# Altium PCB adapter.PcbDoc
Units mil, origin at the board's own origin, x right, y up, seen from the top; angles counter-clockwise.
Board outline 757 x 484 mil, 2 copper layers (Top Layer, Bottom Layer), stack 22.8 mil thick; 36 components, 27 nets, 125 pads, 53 vias.
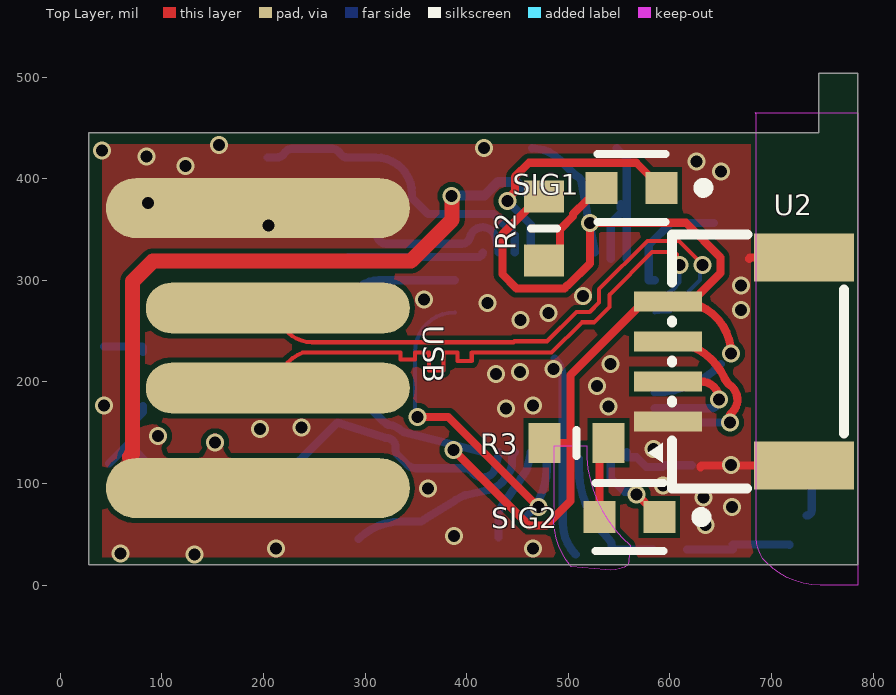
[diagram p0: Top Layer view]
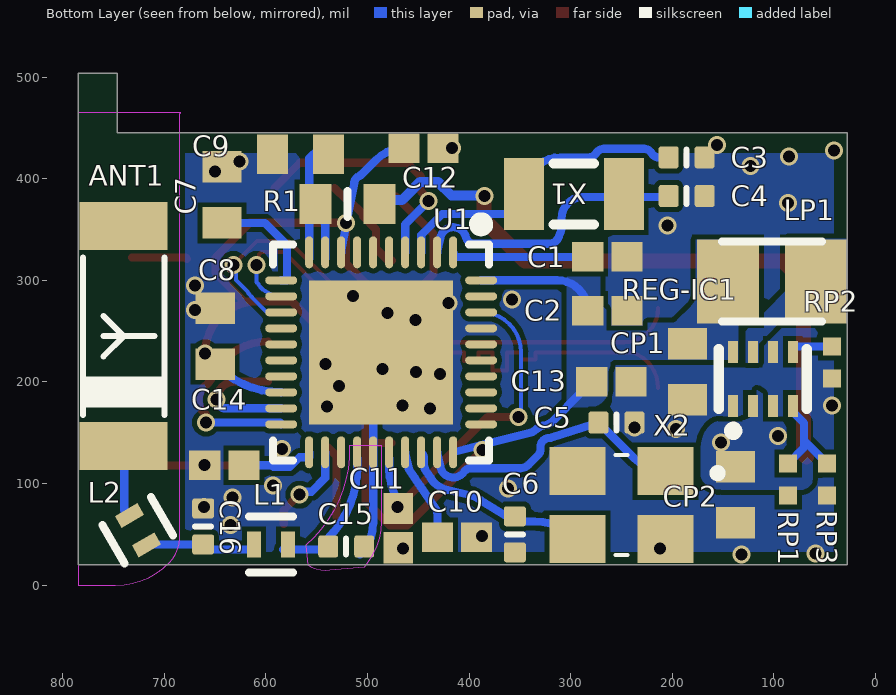
[diagram p1: Bottom Layer view, seen from below]
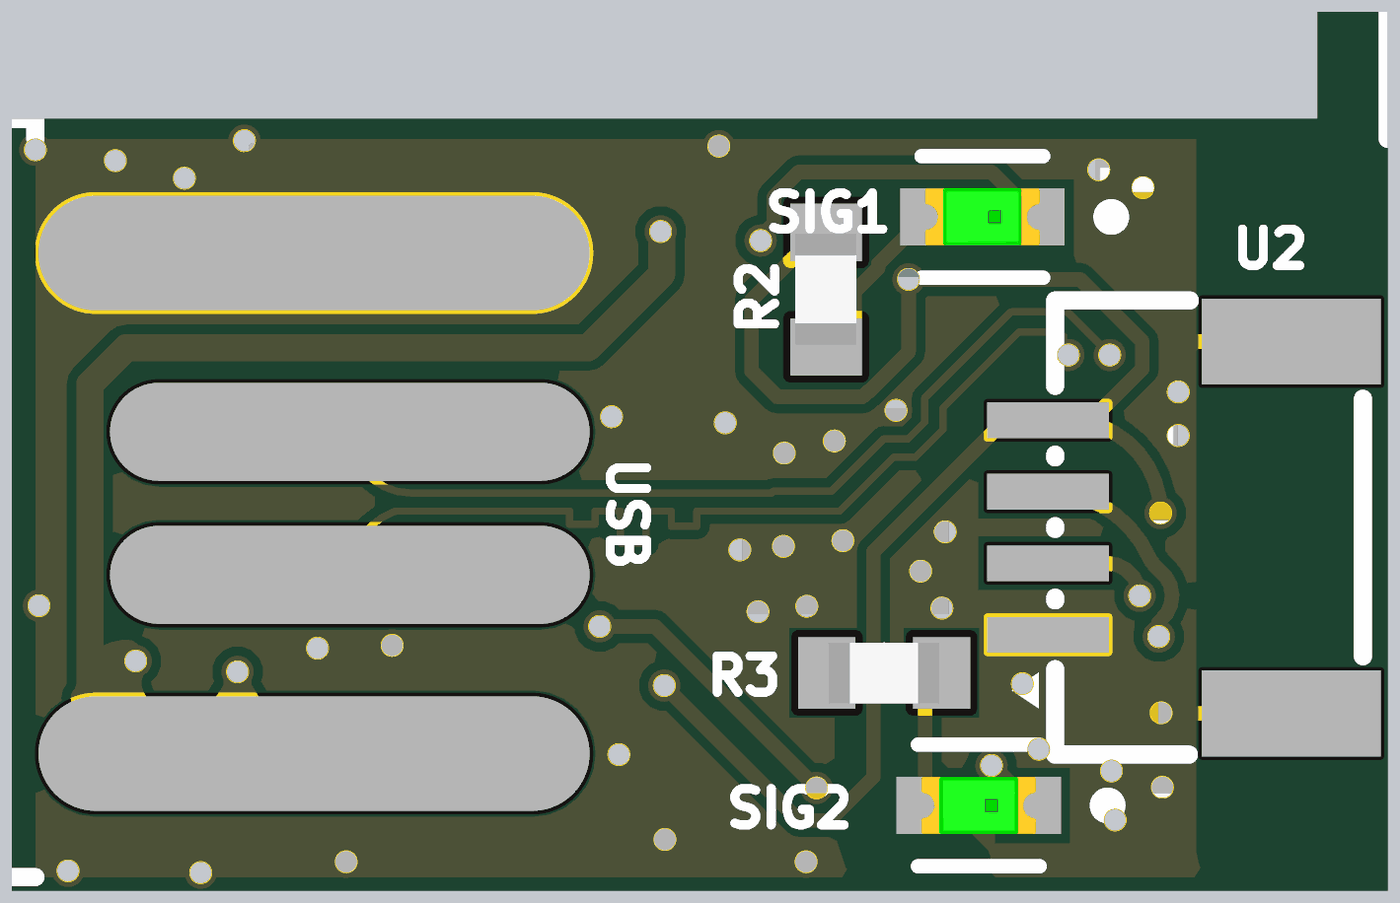
[diagram p2: 3D render of the assembled board from above, using the file's embedded part models]
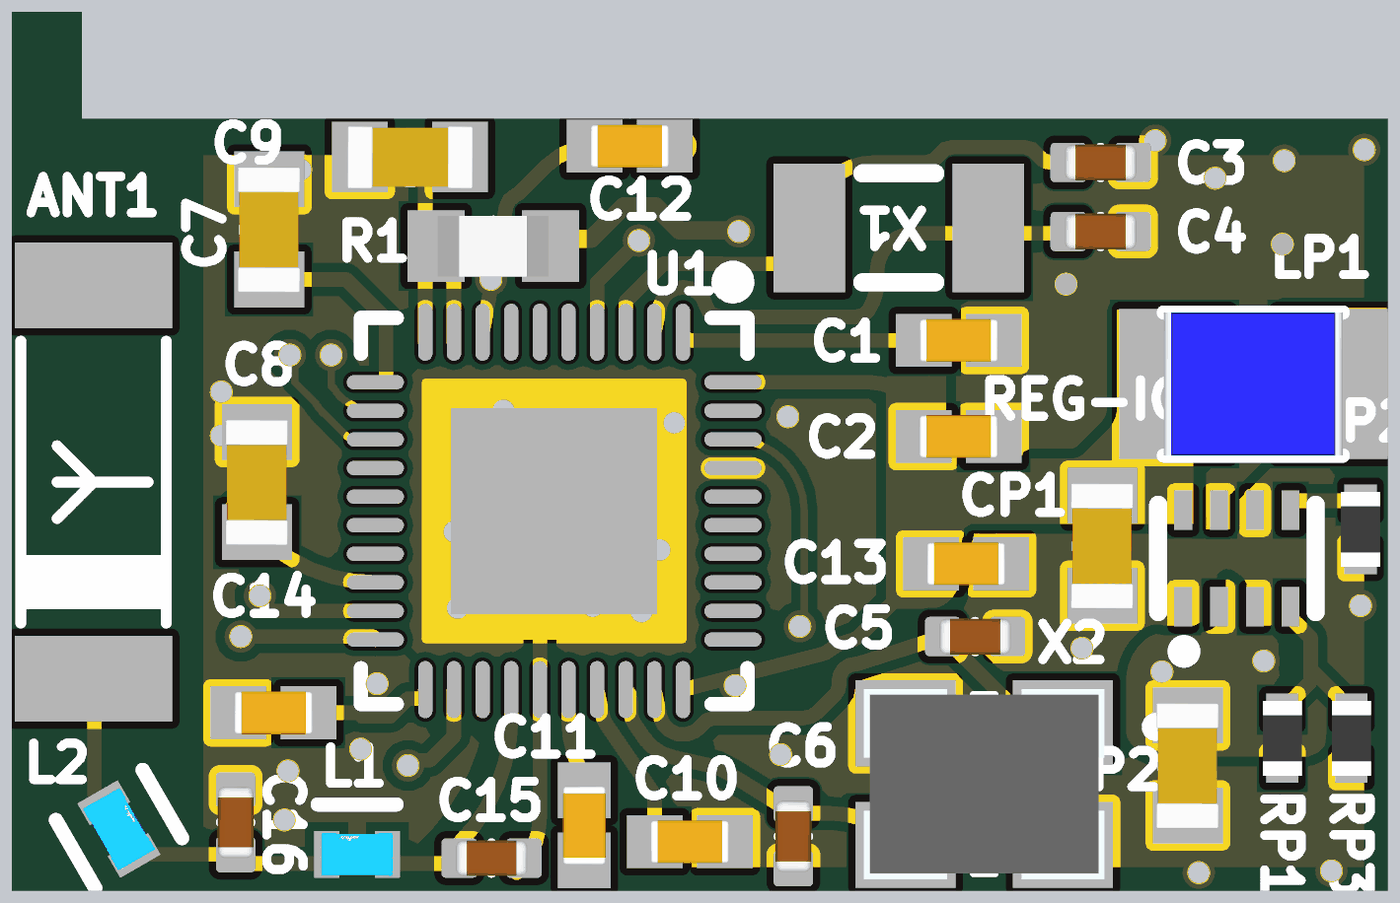
[diagram p3: 3D render of the assembled board from below, using the file's embedded part models]

## Layer stack, top to bottom
Top Solder: solder mask 0.4, Solder Resist, Dk 3.5
Top Layer: signal copper 1.4
Dielectric 1: dielectric 20, FR-4, Dk 4.8
Bottom Layer: signal copper 1.4
Bottom Solder: solder mask 0.4, Solder Resist, Dk 3.5

## Board outline
28,20 28,445 746.37,445 746.37,504 785,504 785,20

## Design rules (kind name [scope] priority, off if disabled: settings)
Clearance [All] p1: gap=5 ignorepadtopadclearanceinfootprint=TRUE
ComponentClearance [All] p1: gap=0 collisioncheckmode=3 verticalgap=10 showdistances=FALSE
DiffPairsRouting [All] p1: maxlimit=10 minlimit=6 mostfreqgap=7 toplayer_minwidth=4 toplayer_maxwidth=15 toplayer_prefwidth=5 bottomlayer_minwidth=4 bottomlayer_maxwidth=15 bottomlayer_prefwidth=5 maxuncoupledlength=500
HoleSize [All] p1: absolutevalues=TRUE maxlimit=236.22 minlimit=11.81 maxpercent=80.000 minpercent=20.000
MinimumSolderMaskSliver [All] p1: minsoldermaskwidth=0
PolygonConnect [All] p1: connectstyle=Direct reliefconductorwidth=10 reliefentries=4 polygonreliefangle="90 Angle" airgapwidth=10
RoutingVias [All] p1: holewidth=11.81 width=17.72 viastyle="Through Hole" minholewidth=11.81 minwidth=15.75 maxholewidth=236.22 maxwidth=236.22
SilkToSilkClearance [All] p1: silktosilkclearance=4
SilkToSolderMaskClearance [IsPad] p1: minsilkscreentomaskgap=0 clearancetoexposedcopper=TRUE
SolderMaskExpansion [All] p1: expansion=4 istentingtop=FALSE
Width [All] p1: maxlimit=100 minlimit=3.5 preferedwidth=4.5
24 further rules are at their usual default settings.

## Classes and differential pairs
component class nrf52833-core: ANT1 C1 C2 C3 C4 C5 C6 C7 C8 C9 C10 C11 C12 C13 C14 C15 C16 L1 L2 R1 R2 R3 SIG1 SIG2 U1 U2 X1 X2
component class adapter-core: CP1 CP2 LP1 REG-IC1 RP1 RP2 RP3 USB
differential pair USBD: +USBD_P -USBD_N

## Components (designator, comment, footprint, x,y, rotation, side; value= is the part's Value field where it differs from the comment)
ANT1 "ANT_CA-C03" ANT-SMD_L5.5-W2.0 740,245 r90 bottom
C1 "Capacitor 0.1 uF +/- 5% 16 V 0402" CAPC1005X56X25ML10T15 264,323 r0 bottom value=100nF
C2 "Capacitor 0.1 uF +/- 5% 16 V 0402" CAPC1005X56X25ML10T15 264.1,270.1 r180 bottom value=1.0uF
C3 "Capacitor 12pF +/-10% 50V 0402" CAPC0402(1005)33_L 186,421 r180 bottom value=12pF
C4 "Capacitor 12pF +/-10% 50V 0402" CAPC0402(1005)33_L 186,383 r180 bottom value=12pF
C5 "Capacitor 12pF +/-10% 50V 0402" CAPC0402(1005)33_L 255,160 r180 bottom value=22pF
C6 "Capacitor 12pF +/-10% 50V 0402" CAPC0402(1005)33_L 355,50 r270 bottom value=22pF
C7 "4.7uF" CAPC1608X87N 643.31,384.13 r90 bottom
C8 "4.7uF" CAPC1608X87N 650,245 r90 bottom
C9 "4.7uF" CAPC1608X87N 566,424 r0 bottom
C10 "Capacitor 0.1 uF +/- 5% 16 V 0402" CAPC1005X56X25ML10T15 412,47 r0 bottom value=100nF
C11 "Capacitor 0.1 uF +/- 5% 16 V 0402" CAPC1005X56X25ML10T15 470,56 r90 bottom value=NC
C12 "Capacitor 0.1 uF +/- 5% 16 V 0402" CAPC1005X56X25ML10T15 445,430 r180 bottom value=100nF
C13 "Capacitor 0.1 uF +/- 5% 16 V 0402" CAPC1005X56X25ML10T15 260,200 r180 bottom value=100nF
C14 "Capacitor 0.1 uF +/- 5% 16 V 0402" CAPC1005X56X25ML10T15 641,118 r180 bottom value=NC
C15 "Capacitor 12pF +/-10% 50V 0402" CAPC0402(1005)33_L 521,38 r0 bottom value=1.0pF
C16 "Capacitor 12pF +/-10% 50V 0402" CAPC0402(1005)33_L 661.82,57.72 r270 bottom value=1.2pF
CP1 "4.7uF" CAPC1608X87N 185,210 r90 bottom
CP2 "4.7uF" CAPC1608X87N 138,89 r90 bottom
L1 "4.7nH 0402" FP-LQW15AN_00-W0_6-0_1-MFG 595,40 r0 bottom
L2 "2.2nH 0402" FP-LQW15AN_00-W0_6-0_1-MFG 726,54 r60 bottom
LP1 "252012CDMCDS2R2MC" INDPM2520X120N 102,299 r0 bottom
R1 "2.2R" RESC1608X55N 520,375 r0 bottom
R2 "180R" RESC1608X55N 476,351 r90 top
R3 "180R" RESC1608X55N 508,140 r180 top
REG-IC1 "TPS62840DLCR" VSON-8_L2.0-W1.5-P0.50-BL 111,203 r180 bottom
RP1 "50k" RESC1005X40X25LL05T05 86,104 r90 bottom
RP2 "100kR" RESC1005X40X25LL05T05 43,219 r90 bottom
RP3 "30k" RESC1005X40X25LL05T05 48,104 r90 bottom
SIG1 "LTST-C190GKT" FP-LTST-C190GKT-MFG 562,391 r180 top
SIG2 "LTST-C190GKT" FP-LTST-C190GKT-MFG 560,67 r180 top
U1 "nRF52833-QDAA-R" QFN-40_L5.0-W5.0-P0.40-TL-EP3.6 486.6,229.13 r270 bottom
U2 "ZX-SH1.0-4PWT" CONN-SMD_4P-P1.00_MEGASTAR_ZX-SH1.0-4PWT 665,220 r90 top
USB "EPHB_USB_PCB_Type-A" USB_PCB_Type-A 44.71,233.35 r0 top
X1 "32.768kHz" FC-135R_L3.2-W1.5 297,385 r180 bottom
X2 "1C208000BC0R" 1C208000BC0R 250,78.74 r0 bottom

## Footprints (in the part's own frame and the unit in brackets; to place one, negate y for a bottom-side part, rotate by r counter-clockwise, add the part's x,y. Pads: shape width x height; smd on the part's side, far side on the other; paste and mask are expansions set on the pad)
1C208000BC0R [mm]
  rect 1.4x1.2 smd: 1(-1.1,-0.85) 2(1.1,-0.85) 3(1.1,0.85) 4(-1.1,0.85)
  silkscreen extent -2.5,-1.25 0.15,1.25, body extent -1.68,-1.33 1.68,1.33, height 0.95
ANT-SMD_L5.5-W2.0 [mm]
  rect 1.2x2.2 smd: 1(-2.75,0) 2(2.75,0)
  silkscreen extent -1.97,-1.02 1.97,1.02
CAPC0402(1005)33_L [mm] "Chip Capacitor, Body 1.0x0.5mm, Height 0.33mm, IPC High Density"
  rrect25% 0.5x0.55 smd: 1(-0.45,0) 2(0.45,0)
  silkscreen extent 0,-0.2 0,0.2, body extent -0.5,-0.25 0.5,0.25, height 0.55
CAPC1005X56X25ML10T15 [mm] "Chip Capacitor, 2-Leads, Body 1.10x0.60mm, IPC Low Density"
  rect 0.78x0.74 smd: 1(-0.49,0) 2(0.49,0)
  body extent -0.55,-0.3 0.55,0.3, height 0.56
CAPC1608X87N [mm]
  rect 0.78x0.98 smd: 1(-0.7,0) 2(0.7,0)
  body extent -0.88,-0.43 0.87,0.44, height 0.91
CONN-SMD_4P-P1.00_MEGASTAR_ZX-SH1.0-4PWT [mm]
  rect 0.5x1.7 smd paste+0 mask+0.05: 1(-1.5,1.7) 2(-0.5,1.7) 3(0.5,1.7) 4(1.5,1.7)
  rect 1.2x2.5 smd paste+0 mask+0.05: 5(2.6,-1.7) 6(-2.6,-1.7)
  silkscreen extent -3.17,-2.7 3.18,2.21
FC-135R_L3.2-W1.5 [mm]
  rect 1x1.8 smd: 1(-1.25,0) 2(1.25,0)
  silkscreen extent -0.51,-0.76 0.51,0.76
FP-LQW15AN_00-W0_6-0_1-MFG [mm]
  rect 0.35x0.65 smd paste+0 mask+0: 1(-0.425,0) 2(0.425,0)
  silkscreen extent -0.55,-0.7 0.55,0.7, body extent -0.5,-0.3 0.5,0.3, height 0.6
FP-LTST-C190GKT-MFG [mm]
  rect 0.8x0.8 smd paste+0 mask+0: 1(-0.75,0) 2(0.75,0)
  silkscreen extent -1.92,-0.85 0.85,0.85, body extent -1.25,-0.55 1.25,0.55, height 0.25
INDPM2520X120N [mm]
  rect 1.55x2.1 smd: 1(-1.1,0) 2(1.1,0)
  silkscreen extent -1.25,-1 1.25,1, body extent -1.25,-1 1.25,1, height 1.2
QFN-40_L5.0-W5.0-P0.40-TL-EP3.6 [mm]
  oval 0.8x0.2 smd paste-100 mask+0.05: 1(-2.499,1.8) 2(-2.499,1.4) 3(-2.499,1) 4(-2.499,0.6) 5(-2.499,0.2) 6(-2.499,-0.2) 7(-2.499,-0.6) 8(-2.499,-1) 9(-2.499,-1.4) 10(-2.499,-1.8) 21(2.499,-1.8) 22(2.499,-1.4) 23(2.499,-1) 24(2.499,-0.6) 25(2.499,-0.2) 26(2.499,0.2) 27(2.499,0.6) 28(2.499,1) 29(2.499,1.4) 30(2.499,1.8)
  oval 0.2x0.8 smd paste-100 mask+0.05: 11(-1.8,-2.499) 12(-1.4,-2.499) 13(-1,-2.499) 14(-0.6,-2.499) 15(-0.2,-2.499) 16(0.2,-2.499) 17(0.6,-2.499) 18(1,-2.499) 19(1.4,-2.499) 20(1.8,-2.499) 31(1.8,2.499) 32(1.4,2.499) 33(1,2.499) 34(0.6,2.499) 35(0.2,2.499) 36(-0.2,2.499) 37(-0.6,2.499) 38(-1,2.499) 39(-1.4,2.499) 40(-1.8,2.499)
  rect 3.6x3.6 smd paste-100 mask+0.05: 41(0,0)
  silkscreen extent -3.35,-2.7 2.7,2.7
RESC1005X40X25LL05T05 [mm]
  rect 0.45x0.45 smd: 1(-0.4,0) 2(0.4,0)
  body extent -0.53,-0.28 0.53,0.28, height 0.4
RESC1608X55N [mm]
  rect 0.8x1 smd: 1(-0.8,0) 2(0.8,0)
  silkscreen extent 0,-0.33 0,0.33, body extent -0.77,-0.42 0.78,0.43, height 0.45
USB_PCB_Type-A [mm]
  oval 7.6x1.5 smd paste+0.051: 1(3.8,3.5) 4(3.8,-3.5)
  oval 6.6x1.27 smd paste+0.051: 2(4.3,1) 3(4.3,-1)
VSON-8_L2.0-W1.5-P0.50-BL [mm]
  rect 0.25x0.55 smd: 1(-0.75,-0.675) 2(-0.25,-0.675) 3(0.25,-0.675) 4(0.75,-0.675) 5(0.75,0.675) 6(0.25,0.675) 7(-0.25,0.675) 8(-0.75,0.675)
  silkscreen extent -1.1,-1.4 1.1,0.75

## Part data
ANT1: JLCPCB Part Class="Extended Part", Add into BOM=yes, Convert to PCB=yes, Device=ANT_CA-C03, LCSC Part Name=ANT_CA-C03, Manufacturer Part=ANT_CA-C03, Supplier=LCSC, Supplier Footprint=ANT-SMD_L5.5-W2.0-P5.0, Supplier Part=C9900003739, Symbol=ANT_CA-C03
C1 C2 C10 C11 C12 C13 C14: library part CMP-001-00001-4, "Chip Capacitor, 0.1 uF, +/- 5%, 16 V, 0402 (1005 Metric)", Capacitor Type=Ceramic, Case/Package=0402, Max Operating Temperature=125°C, Min Operating Temperature=-55°C, Tolerance=5%, Voltage Rating=16V, Mounting Technology=SM, Pins=2, RoHS Compliant=True
C3 C4 C5 C6 C15 C16: library part CMP-001-00072-2, "Chip Capacitor, 12pF +/-10%, 50V, 0402, Thickness 0.33 mm", Case/Package=0603, Max Operating Temperature=85°C, Min Operating Temperature=-55°C, Tolerance=20%, Voltage Rating=50V, Mounting Technology=SMT, Pins=2
C7 C8 C9 CP1 CP2: library part C0603C100D5GACTU, "Capacitor", Manufacturer_Name=KEMET, Arrow Part Number=C0603C100D5GACTU, Arrow Price/Stock=https://www.arrow.com/en/products/c0603c100d5gactu/kemet-corporation, Datasheet Link=https://content.kemet.com/datasheets/KEM_C1003_C0G_SMD.pdf, Height=0.87mm, Manufacturer_Part_Number=C0603C100D5GACTU
L1 L2: library part CMP-06042-010257-1, "Wire Wound RF Inductor 5.8nH ±0.1nH 700mA 0.09Ω 0402 (1005)", Case Code (Imperial)=0402, Case Code (Metric)=1005, Current=135mA, Current Rating=700mA, DC Resistance (DCR)=120mR, Inductance=5.8nH, Max Operating Temperature=125°C, Min Operating Temperature=-55°C, Package Quantity=10000, Self Resonant Frequency=8GHz, Test Frequency=100MHz, Tolerance=2%, Case/Package=0402, Core Material=Air, DC Current=700mA, Depth=0.7mm, Height=0.5mm, Length=1mm, Max DC Current=700mA, Military Standard=Not, Mount="Surface Mount", Packaging="Tape and Reel", Q Factor=25, Radiation Hardening=No, REACH SVHC="No SVHC", Shielding=Unshielded, Termination=SMD/SMT, Weight=2.8E-05oz, Width=0.02inch
LP1: "Inductor", Manufacturer_Name=Sumida, Manufacturer_Part_Number=252012CDMCDS‐2R2MC, Datasheet Link=https://products.sumida.com/products/pdf/252012CDMCDDS%20(en).pdf, Height=1.2mm
R1 R2 R3: library part CPF0603B107KE, "Resistor", Manufacturer_Name="TE Connectivity", Mouser Part Number=N/A, Datasheet Link=http://www.farnell.com/datasheets/1786775.pdf, Height=0.55mm, Manufacturer_Part_Number=CPF0603B107KE, Mouser Price/Stock=https://www.mouser.co.uk/ProductDetail/TE-Connectivity-Neohm/CPF0603B107KE?qs=chTDxNqvsyktnr3nIHFpYA%3D%3D
REG-IC1: Frequency - Switching=1.8MHz, JLCPCB Part Class="Extended Part", LCSC Part Name="1.8V至6.5V、750mA、60nA IQ降压转换器", Manufacturer=TI(德州仪器), Operating Temperature=-40℃~+125℃@(TJ), Output Current=750mA, Output Voltage=1.8V~3.3V, Quiescent Current=-, Voltage - Supply=1.8V~6.5V, Add into BOM=yes, Convert to PCB=yes, Datasheet=https://www.ti.com/cn/lit/gpn/tps62840, Device=TPS62840DLCR, Function=降压型, Manufacturer Part=TPS62840DLCR, Number of Outputs=1, Output Type=可调, Supplier=LCSC, Supplier Footprint=VSON-8(1.5x2), Supplier Part=C2071859, Switch tube (built-in/external)=内置, Symbol=TPS62840DLCR, Synchronous Rectifier=是, Topology=降压式
RP1 RP2 RP3: library part CMP-2002-01154-4, "Chip Resistor, 4.7 KOhm, +/- 1%, 0.1 W, -55 to 155 degC, 0402 (1005 Metric), RoHS, Tape and Reel", Case Code (Imperial)=0402, Case Code (Metric)=1005, Max Operating Temperature="155 degC", Min Operating Temperature="-55 degC", Package Quantity=1, PartNumber=ERJ-2RKF4701X, Power Rating="100 mW", Resistance="4.7 KOhm", Tolerance=1%, Voltage Rating="50 V", Case\/Package=0402, ComponentLink1Description="Manufacturer URL", ComponentLink1URL=http://www.panasonic.com/, ComponentLink2Description=Datasheet, ComponentLink2URL=http://industrial.panasonic.com/cdbs/www-data/pdf/RDA0000/AOA0000C86.pdf, DatasheetVersion=04/2015, Height="0.35 mm", Length="1 mm", Mount="Surface Mount", Mounting Technology="Surface Mount", PackageDescription="2-Pin Surface Mount Device, Body 1 x 0.5 mm", PackageReference=0402, Packaging="Cut Tape", Pins=2, Radiation Hardening=No, REACH SVHC=Yes, RoHSCompliant=true, Width="0.5 mm"
SIG1 SIG2: library part CMP-22017-000005-2, "LED GREEN CLEAR CHIP SMD", Case Code (Imperial)=0603, Case Code (Metric)=1608, Color=Green, Forward Current=30mA, Forward Voltage=2.1V, Lens Color=Colorless, Max Operating Temperature=85°C, Min Operating Temperature=-55°C, Package Quantity=1, Power Dissipation=100mW, Reverse Voltage=5V, Test Current=10mA, Voltage=2V, Case/Package=0603, Depth=0.8mm, Dominant Wavelength=569nm, Height=0.8mm, Illumination Color=Green, Lead Free="Lead Free", Length=1.6mm, Lens Style=Clear, Lens Transparency=Clear, Luminous Intensity=6mcd, Mount="Surface Mount", Number of Elements=1, Number of LEDs=1, Number of Pins=2, Packaging="Tape and Reel", Power Rating=100mW, Radiation Hardening=No, Viewing Angle=130°, Wavelength=565nm, Width=0.8mm
U1: JLCPCB Part Class="Extended Part", Manufacturer=NORDIC, AddInBom=yes, ConvertToPcb=yes, Datasheet=https://item.szlcsc.com/datasheet/nRF52833-QDAA-R/3134439.html, Device=nRF52833-QDAA-R, FootprintName=QFN-40_L5.0-W5.0-P0.40-TL-EP3.6, LCSC Part Name=nRF52833-QDAA-R, ManufacturerPart=nRF52833-QDAA-R, ModelId=e105800079d645bcb749152fa1b71613聨0819f05c4eef4c71ace90d822a990e87, ModelName=QFN-40_L5.0-W5.0-P0.40-TL-EP3.6, ModelTransform=197.6374,197.6374,0,0,0,0,0,0,0, Supplier=LCSC, Supplier Footprint=QFN-40-EP(5x5), SupplierPart=C2895249, Symbol=NRF52833-QDAA-R
U2: "插针结构:1x4P;间距:1mm;安装方式:卧贴;参考系列:SH;总PIN数:4P;排数:1;每排PIN数:4;行距:-;额定电流:1A;触头材质:黄铜;触头镀层:锡;工作温度:-40℃~+85℃;", Color=米色, Current Rating=1A, Flame Retardant Rating=-, JLCPCB Part Class="Extended Part", LCSC Part Name="1x4P 间距:1mm 卧贴 系列:SH", Manufacturer=Megastar(兆星), Operating Temperature=-40℃~+85℃, Voltage Rating=50V, AddInBom=yes, Contact Material=黄铜, Contact Plating=锡, ConvertToPcb=yes, Datasheet=https://item.szlcsc.com/datasheet/ZX-SH1.0-4PWT/8430315.html, Device=ZX-SH1.0-4PWT, FootprintName=CONN-SMD_4P-P1.00_MEGASTAR_ZX-SH1.0-4PWT, ManufacturerPart=ZX-SH1.0-4PWT, ModelId=12775bf286e24184ade05a2f5a42ab9d聨0819f05c4eef4c71ace90d822a990e87, ModelName=CONN-SMD_4P-P1.00_MEGASTAR_ZX-SH1.0-4PWT, ModelTransform=250.393,198.8185,0,0,0,0,0.2,-7.877,0, Mounting Type=卧贴, Number of Pins=4P, Number of PINs Per Row=4, Number Of Rows=1, Pins Structure=1x4P, Pitch=1mm, Plastic Material=LCP, Reference Series=SH, Row Spacing=-, Supplementary Features=辅助焊脚, Supplier=LCSC, Supplier Footprint=SMD,P=1mm,卧贴, SupplierPart=C7430446, Symbol=ZX-SH1.0-4PWT, X-Length of Bottom Edge on Board (Spacing Line)=6.35mm, Y-Width of Bottom Edge on Board=4.3mm, Z-Height of the Board=3.15mm
USB: "板载USB-Type-A连接器", AddInBom=yes, ConvertToPcb=yes, Device=EPHB_USB_PCB_Type-A, FootprintName=USB_PCB_Type-A, Symbol=EPHB_USB_PCB_Type-A
X1: library part Q13FC13500004_C32346, Equivalent Series Resistance (ESR)=70kΩ, JLCPCB Part Class="Basic Part", LCSC Part Name="32.768kHz ±20ppm 12.5pF", Load Capacitor=12.5pF, Manufacturer=EPSON(爱普生), Manufacturer Part=Q13FC13500004, Normal temperature Frequency Tolerance=±20ppm, Operating Temperature=-40℃~+85℃, Add into BOM=yes, Convert to PCB=yes, Crystal Type=贴片晶振, Datasheet=https://atta.szlcsc.com/upload/public/pdf/source/20240418/0E0FF5F0356BA3753F616001439D1416.pdf, Device=Q13FC13500004_C32346, Supplier=LCSC, Supplier Footprint=SMD3215-2P, Supplier Part=C32346, Symbol=Q13FC1350000400
X2: "Crystal or Oscillator", Manufacturer_Name="KDS Daishinku", Datasheet Link=https://datasheet.lcsc.com/szlcsc/1811271030_KDS-Daishinku-KDS-DSX321G-8MHz_C57131.pdf, Height=0.85mm, Manufacturer_Part_Number=1C208000BC0R

## Via types
v1: diameter 17.72, hole 11.81, Top Layer to Bottom Layer, tented both sides, 53 vias

## Nets (pads, with @x,y where several pads share a name; then routed paths per layer and width w, separated by ;. In a path a pad name is that pad's centre, name@x,y a point inside that pad or via, vN(x,y) a via of type N, cw(c..) or ccw(c..) an arc to the next point about the centre after c; other vN are vias at no path point)
3.3V: C2.1 C8.1 C12.1 C13.1 CP1.2 LP1.2 R2.2 R3.2 REG-IC1.8 U1.8 U1.18 U1.30 U1.40 U2.4 | length 1461.5
  Top Layer w8: v1(387,133) 461.23,58.77 478.14,58.77 502,82.63 502,137 ; R3.2 499,140 cw(c499,137) 502,137 ; R2.2@479.94,382.5 472.06,382.5 435,345.43 435,306 449,292 496,292 498.76,294.76 499.41,294.76 521.36,316.7 v1(521.36,356.63) 615.62,356.63 649.86,322.4 649.86,307.23 621.69,279.06 U2.4@608.94,279.06 ; v1(660,228) ccw(c608.94,228) U2.4@608.94,279.06 ; 502,137 502,140 502,206.61 574.45,279.06 U2.4 U2.4@608.94,279.06
  Bottom Layer w8: C13.1 289.86,189.43 318.18,161.11 ccw(c345,187.92) 319.9,159.49 ccw(c325.17,165.52) 323.98,157.61 cw(c320.87,135.83) 335.65,152.12 ccw(c340.97,158.09) 338.94,150.35 388.22,137.76 U1.30 ; C2.1 cw(c313.29,270.1) 313.29,300 U1.40 ; C12.1 475.65,428.26 cw(c464.29,392.08) 491.08,418.92 505.43,404.57 ccw(c511.04,410.27) 507.81,402.95 cw(c504.25,394.69) 513.11,396.27 520.53,356.6 v1@520.55,356.48 ; v1(521.36,356.63) 520.71,356.63 v1@520.55,356.48 ; U1.8 v1@520.55,356.48 ; U1.18 ccw(c585,279.86) 631.02,202.4 ccw(c585,279.86) 648.71,216.15 C8.1
GND: C1.1 C2.2 C3.2 C4.2 C5.2 C6.2 C7.2 C8.2 C9.2 C10.1 C11.1 C12.2 C13.2 C14.1 C15.1 C16.1 CP1.1 CP2.1 REG-IC1.1 REG-IC1.3 REG-IC1.6 RP2.1 RP3.1 U1.25 U1.37 U1.41 U2.1 U2.5 U2.6 USB.1 X2.2 X2.4 | length 356
  Top Layer w8: 630,116 cw(c631.64,116) 631.64,117.64 U2.6 ; 678,321 cw(c679.36,321) 679.36,322.36 U2.5
  Bottom Layer w8: U1.41@486.6,222.87 cw(c467.6,203.87) 494.47,203.87 U1.25 494.47,60.94 ccw(c538.22,60.94) C15.1@507.28,30
  other v1: 132,30 59,31 212,36 465,36 387.34,48.29 635,59 661,77 633,86 362,95 593,98 660.29,118 584,134 196.25,153.57 237.28,155.12 438.53,173.66 539.71,175.66 43,177 465.39,176.66 528,196 428.53,207.66 452.53,209.66 485.24,212.77 541.53,217.66 453,261 480.53,267.66 669.71,270.66 420.53,277.66 358,281 514.46,284.54 669.71,294.66 205,354 86,376 650.31,407.13 123,412.34 626,417 85,422 41,428 417,430 156,433
LED_SIG1: SIG1.1 U1.4 | length 247.2
  Top Layer w8: v1(440,378) 440,380.23 447.31,387.54 447.31,401.97 461.09,415.75 566.78,415.75 SIG1.1
  Bottom Layer w8: v1(440,378) 462.98,355.02 U1.4
LED_SIG2: SIG2.1 U1.22 | length 94.8
  Top Layer w8: v1(567,89) 567.53,89 582.53,74 SIG2.1@582.53,60
  Bottom Layer w8: U1.22 541.72,105.23 555.09,91.86 567.14,91.86 v1@569,90
NetANT1_1: ANT1.1 L2.2 | length 71.3
  Bottom Layer w8: L2.2 ccw(c734.37,73.61) 739.49,73.61 739.49,135.5 cw(c741.23,135.5) ANT1.1
NetC1_2: C1.2 U1.1 | length 135
  Bottom Layer w8: C1.2 411.2,323 ccw(c411.2,327.53) U1.1
NetC3_1: C3.1 U1.3 X1.1 | length 306.5
  Bottom Layer w8: C3.1 213.46,421 ccw(c213.42,429) 220.32,424.95 cw(c228.1,420.43) 228.1,429.43 267.47,429.43 cw(c267.47,420.43) 275.26,424.94 ccw(c282.15,429) 282.11,421 310.21,421 cw(c310.21,385) X1.1 346.21,380.83 361.9,365.14 394.12,365.14 394.25,365.28 426.47,365.28 447.17,344.58 447.17,327.59 U1.3
NetC4_1: C4.1 U1.2 X1.2 | length 283.6
  Bottom Layer w8: C4.1 ccw(c204.72,383) 204.72,382 288,382 cw(c288,361) 309,361 309,355 ccw(c336.47,355) 313.84,339.43 ccw(c320.4,344) 320.36,336 395.36,336 ccw(c395.32,344) 403.11,342.2 cw(c415.73,339.34) 428.4,341.97 U1.2@431.47,327.57
NetC5_1: C5.1 U1.29 X2.1 | length 281
  Bottom Layer w8: X2.1 ccw(c206.69,156.21) 237.81,125.09 C5.1 278.56,158.12 318.87,145.19 ccw(c321.27,152.82) 321.04,144.83 cw(c320.87,135.83) 329.87,135.83 329.87,133.45 ccw(c337.87,133.45) 332.21,127.79 341.42,118.58 ccw(c350,127.07) 350,115 398.56,115 cw(c398.52,107) 405.09,111.57 ccw(c415.73,118.92) 418.58,106.3 ccw(c415.73,118.92) 428.38,116.22 U1.29
NetC6_1: C6.1 U1.28 X2.3 | length 190.9
  Bottom Layer w8: X2.3 cw(c335.41,3.17) 335.41,62.72 355,62.72 361.83,66.93 388.6,83.47 cw(c392.8,76.66) 389,83.7 396.16,87.57 cw(c400.43,79.65) 398.51,88.44 421.44,93.62 ccw(c415.73,118.92) 437.15,104.3 ; 436.13,102.9 ccw(c415.73,118.92) 437.14,104.28 ; U1.28 ccw(c452.42,124.64) 444.42,124.68 444.42,118.92 cw(c431.48,118.92) 444.13,116.22 cw(c431.48,118.92) 442.16,111.62 437.15,104.3
NetC7_1: C7.1 U1.11 | length 113.7
  Bottom Layer w8: U1.11 579.21,300 579.15,300.06 579.15,314.12 579.15,334.63 601.08,356.57 C7.1
NetC9_1: C9.1 R1.2 U1.9 U1.10 | length 172.7
  Bottom Layer w8: U1.9@541.72,321.27 541.72,356.29 549,363.56 554,368.56 R1.2@556.5,371.06 ; C9.1@547.56,430 557.47,420.09 557.47,375 557.47,371.06 557.47,368.56 U1.10@557.47,321.27 ; R1.2@551.5,371.06 R1.2
NetC10_2: C10.2 U1.27 | length 92.6
  Bottom Layer w8: C10.2 431.29,70.23 cw(c439.29,70.23) 432.69,74.74 434.77,77.79 447.87,96.94 452.87,104.24 ccw(c431.48,118.92) 452.91,104.31 457.89,111.59 ccw(c447.23,118.92) 459.89,116.26 U1.27
NetC11_2: C11.2 U1.26 U1.38 | length 342.6
  Top Layer w8: v1(351.45,165.59) 381.78,165.59 v1(470.74,76.63)
  Bottom Layer w4: v1(351.45,165.59) cw(c353,169.28) 349,169.25 349,229.3 cw(c388.2,229.3) U1.38
  Bottom Layer w8: C11.2@460,69.29 ccw(c414.78,114.51) 478.73,114.51 U1.26@478.73,124.47
NetC14_2: C14.2 U1.21 | length 73.9
  Bottom Layer w8: U1.21 557.47,125.85 557.53,125.78 566.96,125.78 576.6,116.14 592.5,116.14 594.35,118 C14.2
NetC15_2: C15.2 L1.1 U1.24 | length 138.8
  Bottom Layer w8: U1.24@510.22,124.47 510.22,116.2 ccw(c610.22,116.2) 539.51,45.49 540,45 cw(c533.44,38.44) 542.72,38.44 542.72,35 L1.1@583.27,35
NetC16_2: C16.2 L1.2 L2.1 | length 106.4
  Bottom Layer w8: L1.2@616.73,35 661.82,35 C16.2 717.63,40 L2.1
NetLP1_1: LP1.1 REG-IC1.7
NetR2_1: R2.1 SIG1.2 | length 98.4
  Top Layer w8: R2.1 479.94,319.5 491.69,331.25 491.69,350.02 504.69,363.02 504.69,365.21 518.73,379.25 520.72,379.25 SIG1.2
NetR3_1: R3.1 SIG2.2 | length 72.8
  Top Layer w8: SIG2.2 530.47,127.04 R3.1@539.5,136.06
NetREG-IC1_4: REG-IC1.4 RP1.2 RP3.2 | length 99.4
  Bottom Layer w8: RP3.2 70.47,142.22 ; REG-IC1.4 81.47,170.51 70.47,159.51 70.47,142.22 ; RP1.2 70.47,135.28 70.47,142.22
NetREG-IC1_5: REG-IC1.5 RP2.2 | length 43.1
  Bottom Layer w8: RP2.2 80.55,234.75 81.47,233.83 REG-IC1.5
SWDCLK: U1.20 U2.3 | length 195.4
  Top Layer w8: U2.3 cw(c598.07,178.76) 653.88,203.21 ccw(c661.21,206.42) 654.88,201.52 cw(c630.6,182.43) 656.45,199.33 ccw(c663.12,203.75) 658.59,197.16 cw(c648.48,182.43) 659,168 v1(659,160)
  Bottom Layer w8: U1.20 cw(c586.74,158.26) 586.74,160 v1(659,160)
SWDIO: U1.19 U2.2 | length 128.9
  Top Layer w8: U2.2 630.6,200.32 cw(c630.6,182.43) v1(648.48,182.43)
  Bottom Layer w8: U1.19 640.06,174.01 ccw(c640.06,182.43) v1(648.48,182.43)
USBD_N: U1.12 USB.3 | length 586.3
  Top Layer w4: USB.3 cw(c251.02,193.98) 238.36,228.77 cw(c239.71,225) 239.71,229 247.72,229 318.9,229 334.9,229 334.9,221.84 348.9,221.84 348.9,229 362.9,229 362.9,211.28 376.9,211.28 376.9,229 390.9,229 390.9,220.66 404.9,220.66 404.9,229 413,229 483.56,229 513.24,258.69 525.17,258.69 540.31,273.83 540.31,285.76 582.25,327.7 604.28,327.7 606.66,325.32 606.66,317.62 v1(609.28,315)
  Bottom Layer w4: U1.12 ccw(c585,311.25) 601.02,289.51 603.3,291.19 ccw(c596.81,300) 605.92,293.95 607.49,296.31 609.28,298.1 v1(609.28,315)
USBD_P: U1.13 USB.2 | length 570.2
  Top Layer w4: USB.2 ccw(c247.72,272.72) 247.72,239 413,239 446,239 447,240 479,240 507.79,268.79 507.89,268.69 521.02,268.69 530.31,277.98 530.31,291.11 530.21,291.21 577.7,338.7 608.84,338.7 632,315.54 v1(632,315)
  Bottom Layer w4: U1.13 ccw(c585,308.5) 593.02,269.31 599.77,269.31 611.75,281.3 ccw(c596.81,300) 616.75,286.75 618.32,289.12 629.38,300.17 629.38,312.38 v1(632,315)
VCC: CP2.2 R1.1 REG-IC1.2 RP1.1 USB.4 | length 654.2
  Top Layer w15: 68,126 71,129 71,299 91,319 344.98,319 385.52,359.54 385.52,382.48 v1(385,383)
  Bottom Layer w10: v1@385.52,383.52 417.44,383.52 430.78,396.86 448.14,396.86 466,379 488.44,379 R1.1@488.5,378.94
  Bottom Layer w15: v1(385,383) v1@385.52,383.52
  other v1: 152.25,140.57 96.25,146.57
pads on no net: ANT1.2 U1.5 U1.6 U1.7 U1.14 U1.15 U1.16 U1.17 U1.23 U1.31 U1.32 U1.33 U1.34 U1.35 U1.36 U1.39

## Polygon pours and split planes (outlines as drawn)
GND on Bottom Layer "NONET_L-01_P-001" (solid, pour order 3): 41,33 783,33 784.92,35 784.08,424.99 41,425
VCC on Bottom Layer "NONET_L-01_P-001" (solid, pour order 2): 74,94 cw(c74,107) 61,107 61,124 cw(c67,124) 67,130 76,130 ccw(c76,142) 88,142 88,154 cw(c96,154) 96,162 ccw(c96,170) 104,170 104,196 117,196 117,176.66 ccw(c130.66,176.66) 121,167 ccw(c133.07,179.07) 133.07,162 150.93,162 cw(c150.93,144.93) 163,157 cw(c141.27,135.27) 172,135.27 172,108.24 cw(c161.76,108.24) 169,101 cw(c152.1,117.9) 152.1,94
3.3V on Bottom Layer "NONET_L-01_P-001" (solid, pour order 1): 135,222 135,256 115,276 115,340 177,340 177,286 ccw(c193.9,286) 181.95,274.05 195,261 ccw(c202.24,268.24) 202.24,258 239,258 ccw(c239,289.38) 261.19,267.19 267,273 ccw(c257.35,282.66) 271,282.66 271,315 299.59,315 ccw(c299.59,318.41) 302,316 cw(c297.12,311.12) 304.02,311.12 304.02,175.27 280.42,175.27 cw(c280.42,191.42) 269,180 cw(c283.48,194.49) 263,194.49 263,207.51 ccw(c242.52,207.52) 257,222
NetLP1_1 on Bottom Layer "NONET_L-01_P-001" (solid, pour order 0): 87,340 87,291.07 128,250.07 128,219 115,219 115,237.76 93.76,259 28,259 28,339 26,341 86,341
GND on Top Layer "NONET_L-01_P-001" (solid, pour order 4): 41,434 41,27.51 687,27.51 687,429 683,434
VCC on Top Layer "NONET_L-01_P-001" (solid, pour order 5): 47,108 cw(c98,108) 98,159 158,159 cw(c158,132) 185,132 ccw(c192,132) 192,125 229,125 cw(c229,123) 231,123 231,67

## Keep-outs
Keep-Out Layer:
  region: 486,137 518,137 518,125.42 ccw(c643.82,134.12) 561,39 559,20 cw(c541.97,44.04) 537,15 503,18 cw(c557.44,64.59) 486,70.14
  region: 785,465 785,0 748.11,0 cw(c748.11,75.11) 695,22 cw(c719.14,46.14) 685,46.14 685,462.59 ccw(c681.59,462.59) 684,465

## Silkscreen, mask and mechanical layers (free items; w line width, h text height)
Mechanical 1:
  lines w1: 28,20 28,445 746.37,445 746.37,465.63 746.37,504 785,504 785,465 785,20 28,20

## Dimensions
41,27.51 to 746.37,445 on Top Overlay
41,434 to 785,0 on Top Overlay